# EAGLE board with_solar_universal (EAGLE 9.4.2)
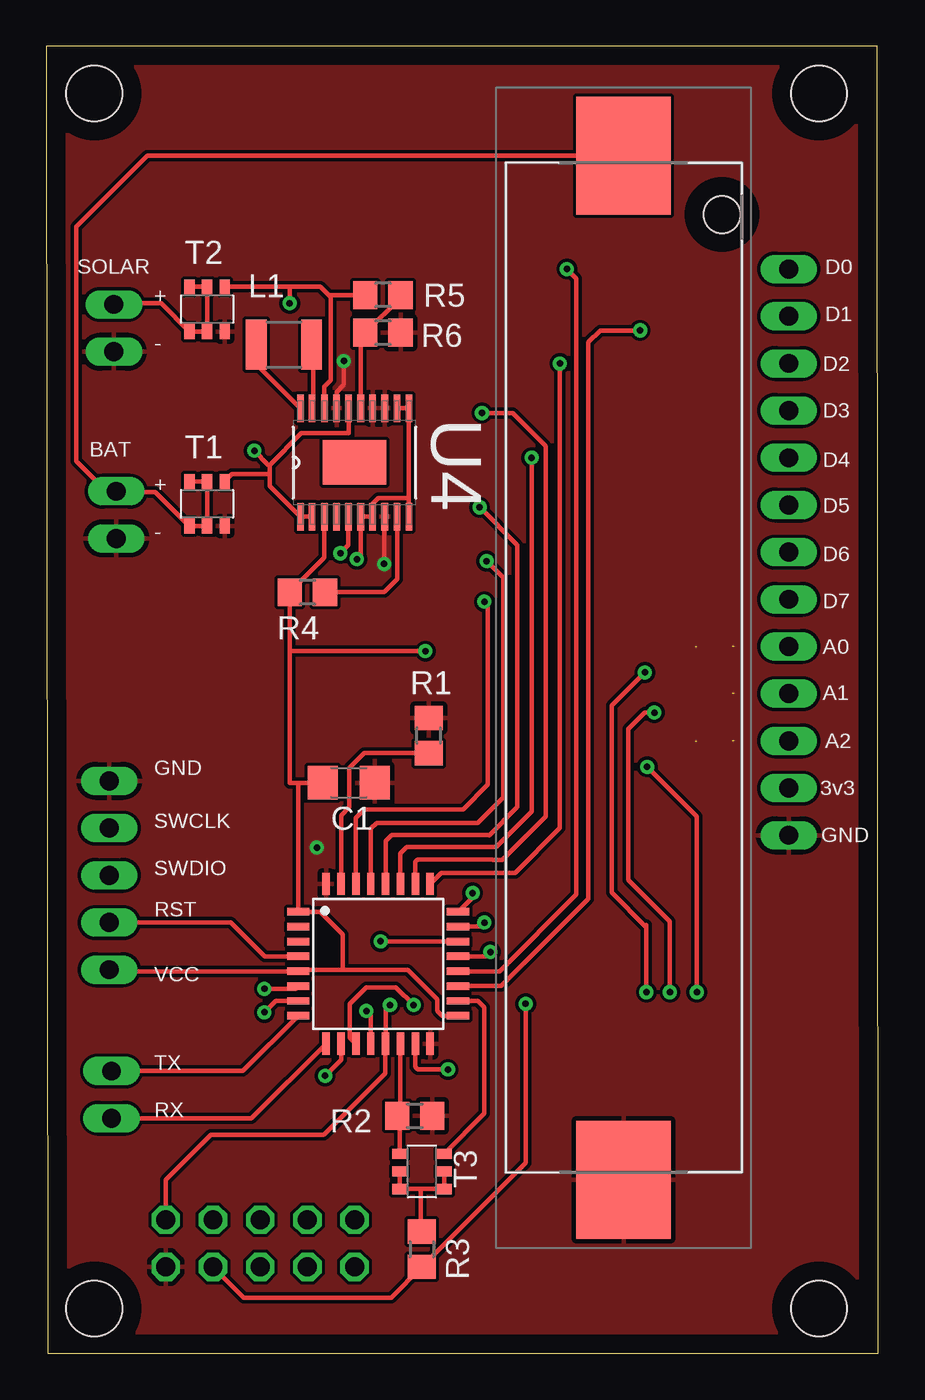
[diagram p0: board, top side]
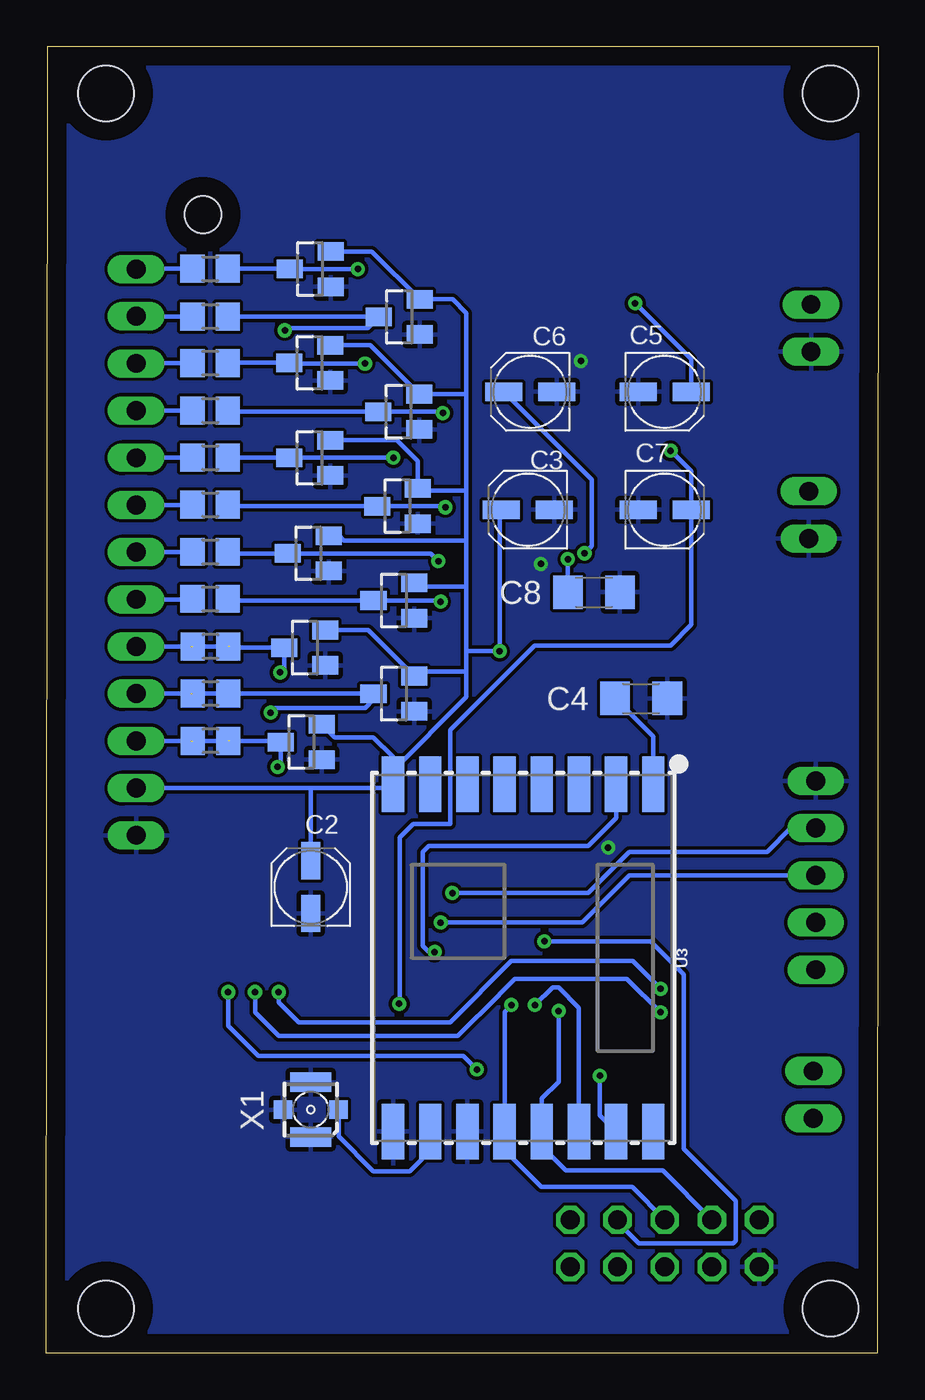
[diagram p1: board, bottom side, seen from below]

Size 44.78 x 70.35 mm. Coordinates in mm from the lower left corner, seen from the top.
Outline: 0.07,0 44.78,0 44.7,70.35 0,70.35 0.07,0
Copper layers (1*16): Top 0.035mm / dielectric 1.5mm / Bottom 0.035mm
Design rules "default *": minimum track width 6mil, minimum drill 0.35mm, track to track 7mil, track to pad 6mil, pad to pad 6mil, via to via 6mil, smd to smd 6mil, copper to edge 40mil, drill to drill 6mil, minimum pad ring 10mil, minimum via ring 8mil, stop-mask expansion 4mil, vias tented up to drill 0mil, thermal gap 10mil
Holes 3 mm at 2.57,2.41 41.57,2.41 41.57,67.81 2.57,67.81

## Footprints (pad centres in the part's own frame; a part is rotated, then mirrored left to right if it is on the bottom)
C1206 = smd 1.6 x 1.8: 1 -1.4,0; 2 1.4,0
UD-4X5,8_NICHICON = smd 2 x 1: + 1.425,0; - -1.425,0
SOT23 = smd 1 x 1.4: 1 -0.95,-1.1; 2 0.95,-1.1; 3 0,1.1
1076 = smd 6.35 x 5.08: 1 -27.57,0; 2 27.57,0 | hole 1.98: -24.395,5.3
R1210 = smd 1.12 x 2.7: 1 -1.49,0; 2 1.49,0
R0805 = smd 1.3 x 1.5: 1 -0.95,0; 2 0.95,0
LQFP32-7X7 = smd 1.2 x 0.4: 1 -4.3,2.8; 2 -4.3,2; 3 -4.3,1.2; 4 -4.3,0.4; 5 -4.3,-0.4; 6 -4.3,-1.2; 7 -4.3,-2; 8 -4.3,-2.8; 17 4.3,-2.8; 18 4.3,-2; 19 4.3,-1.2; 20 4.3,-0.4; 21 4.3,0.4; 22 4.3,1.2; 23 4.3,2; 24 4.3,2.8 | smd 0.4 x 1.2: 9 -2.8,-4.3; 10 -2,-4.3; 11 -1.2,-4.3; 12 -0.4,-4.3; 13 0.4,-4.3; 14 1.2,-4.3; 15 2,-4.3; 16 2.8,-4.3; 25 2.8,4.3; 26 2,4.3; 27 1.2,4.3; 28 0.4,4.3; 29 -0.4,4.3; 30 -1.2,4.3; 31 -2,4.3; 32 -2.8,4.3
SOT457R_PHILIPS = smd 0.55 x 0.8: 1 -0.95,-1.2; 2 0,-1.2; 3 0.95,-1.2; 4 0.95,1.2; 5 0,1.2; 6 -0.95,1.2
RFM69W-XXXS2 = smd 3 x 1.2: 1 -9.35,7; 2 -9.35,5; 3 -9.35,3; 4 -9.35,1; 5 -9.35,-1; 6 -9.35,-3; 7 -9.35,-5; 8 -9.35,-7; 9 9.35,-7; 10 9.35,-5; 11 9.35,-3; 12 9.35,-1; 13 9.35,1; 14 9.35,3; 15 9.35,5; 16 9.35,7
LTC3106 = smd 1.473 x 0.356: 1 -2.921,2.921; 2 -2.921,2.286; 3 -2.921,1.626; 4 -2.921,0.965; 5 -2.921,0.33; 6 -2.921,-0.33; 7 -2.921,-0.965; 8 -2.921,-1.626; 9 -2.921,-2.286; 10 -2.921,-2.921; 11 2.921,-2.921; 12 2.921,-2.286; 13 2.921,-1.626; 14 2.921,-0.965; 15 2.921,-0.33; 16 2.921,0.33; 17 2.921,0.965; 18 2.921,1.626; 19 2.921,2.286; 20 2.921,2.921 | smd 2.388 x 3.404: 21 0,0
MA02-1 = drill 1.016 long: 1 -2.54,0; 2 0,0
MA05-1 = drill 1.016 long: 1 -5.08,0; 2 -2.54,0; 3 0,0; 4 2.54,0; 5 5.08,0
MA05-2 = drill 1.016 octagon: 1 -5.08,-1.27; 2 -5.08,1.27; 3 -2.54,-1.27; 4 -2.54,1.27; 5 0,-1.27; 6 0,1.27; 7 2.54,-1.27; 8 2.54,1.27; 9 5.08,-1.27; 10 5.08,1.27
MA13-1 = drill 1.016 long: 1 -15.24,0; 2 -12.7,0; 3 -10.16,0; 4 -7.62,0; 5 -5.08,0; 6 -2.54,0; 7 0,0; 8 2.54,0; 9 5.08,0; 10 7.62,0; 11 10.16,0; 12 12.7,0; 13 15.24,0
734120110 = smd 1 x 1: 1 0,-1.5; S@1 0,1.5 | smd 1.05 x 2.2: S@2 -1.475,0; S@3 1.475,0

## Placement (x,y rotation side)
C1  100n  [C1206]  16.27,30.71 0 top
C2  10u  [UD-4X5,8_NICHICON]  30.55,25.09 90 bottom
C3  47u  [UD-4X5,8_NICHICON]  18.87,45.41 180 bottom
C4  100n  [C1206]  12.77,35.25 0 bottom
C5  47u  [UD-4X5,8_NICHICON]  11.5,51.76 0 bottom
C6  2,2u  [UD-4X5,8_NICHICON]  18.74,51.76 180 bottom
C7  47u  [UD-4X5,8_NICHICON]  11.5,45.41 0 bottom
C8  100n  [C1206]  15.31,40.96 0 bottom
D1  BAS70-04  [SOT23]  30.58,58.36 90 bottom
D2  BAS70-04  [SOT23]  25.79,55.79 90 bottom
D3  BAS70-04  [SOT23]  30.62,53.31 90 bottom
D4  BAS70-04  [SOT23]  25.82,50.68 90 bottom
D5  BAS70-04  [SOT23]  30.62,48.2 90 bottom
D6  BAS70-04  [SOT23]  25.89,45.6 90 bottom
D7  BAS70-04  [SOT23]  30.68,43.06 90 bottom
D8  BAS70-04  [SOT23]  26.08,40.52 90 bottom
D9  BAS70-04  [SOT23]  30.87,37.98 90 bottom
D10  BAS70-04  [SOT23]  26.08,35.5 90 bottom
D11  BAS70-04  [SOT23]  31.06,32.9 90 bottom
J1  1076  [1076]  31.06,36.9 270 top
L1  10u  [R1210]  12.77,54.3 0 top
R1  10k  [R0805]  20.57,33.25 90 top
R2  8k  [R0805]  19.82,12.77 180 top
R3  2k  [R0805]  20.2,5.59 270 top
R4  1M  [R0805]  14.04,40.96 180 top
R5  2M  [R0805]  18.11,56.96 180 top
R6  365k  [R0805]  18.11,54.93 180 top
R7  300R  [R0805]  35.96,58.37 0 bottom
R8  300R  [R0805]  35.96,55.81 0 bottom
R9  300R  [R0805]  35.96,53.31 0 bottom
R10  300R  [R0805]  35.96,50.74 0 bottom
R11  300R  [R0805]  35.96,48.21 0 bottom
R12  300R  [R0805]  35.96,45.67 0 bottom
R13  300R  [R0805]  35.96,43.14 0 bottom
R14  300R  [R0805]  35.96,40.61 0 bottom
STM32L031K6_1  STM32L031K6  [LQFP32-7X7]  17.85,20.96 0 top
T1  RTQ035P02HZG  [SOT457R_PHILIPS]  8.65,45.72 0 top
T2  RTQ035P02HZG  [SOT457R_PHILIPS]  8.65,56.2 0 top
T3  [SOT457R_PHILIPS]  20.2,9.78 90 top
U3  RFM69HW  [RFM69W-XXXS2]  19.12,21.28 270 bottom
U4  LTC3106  [LTC3106]  16.58,47.95 90 top
U$1  SJ-C  [R0805]  35.95,38.04 180 bottom
U$2  SJ-C  [R0805]  35.95,35.5 180 bottom
U$3  SJ-C  [R0805]  35.95,32.96 180 bottom
U$4  MA02-1  [MA02-1]  3.76,46.39 90 top
U$5  MA02-1  [MA02-1]  3.63,56.45 90 top
U$6  MA02-1  [MA02-1]  3.5,12.64 270 top
U$7  MA05-1  [MA05-1]  3.38,25.72 270 top
U$8  MA05-2  [MA05-2]  11.5,5.91 0 top
U$9  MA13-1  [MA13-1]  39.95,43.12 270 top
X1  734120110  [734120110]  30.55,13.11 90 bottom

## Library data of the parts
C1-C8 = rcl; SPICEPREFIX: C
D1-D11 = nxp_60
J1 = 1076; DESCRIPTION: Cylindrical Battery Contacts, Clips, Holders & Springs AAA holder w/ coil Spring SMT; HEIGHT: 11.18mm; MANUFACTURER_NAME: Keystone Electronics; MANUFACTURER_PART_NUMBER: 1076; MOUSER_PART_NUMBER: 534-1076; MOUSER_PRICE-STOCK: https://www.mouser.com/Search/Refine.aspx?Keyword=534-1076
L1 STM32L031K6_1 T1-T3 U$1-U$9 = dp
R1-R14 = rcl; SPICEPREFIX: R
U3 = SparkFun-RF
U4 = LTC3106
X1 = con-coax

## Nets
A0: D9.3 STM32L031K6_1.6 U$1.1
A1: D10.3 STM32L031K6_1.7 U$2.1
A2: D11.3 STM32L031K6_1.15 U$3.1
BAT_ADC: R2.2 STM32L031K6_1.14 T3.4
BAT_IN: C7.+ R3.2 T1.4 U4.1 U4.2 U4.16 U$8.3
BAT_SW: STM32L031K6_1.18 T3.3
D2: D3.3 R9.2 STM32L031K6_1.25
D3: D4.3 R10.2 STM32L031K6_1.26
D4: D5.3 R11.2 STM32L031K6_1.27
D5: D6.3 R12.2 STM32L031K6_1.28
D6: D7.3 R13.2 STM32L031K6_1.29
D7: D8.3 R14.2 STM32L031K6_1.30
GND: C1.2 C2.- C3.- C4.2 C5.- C6.- C7.- C8.2 D1.1 D2.1 D3.1 D4.1 D5.1 D6.1 D7.1 D8.1 D9.1 D10.1 D11.1 J1.2 R1.2 R2.1 R6.1 STM32L031K6_1.16 STM32L031K6_1.32 T1.3 T2.3 U3.9 U3.11 U4.8 U4.13 U4.14 U4.17 U$4.1 U$5.1 U$7.1 U$8.1 U$9.13 X1.S@1 X1.S@2 X1.S@3
I2C_SCL: D2.3 R8.2 STM32L031K6_1.19
I2C_SDA: D1.3 R7.2 STM32L031K6_1.20
N$1: R1.1 STM32L031K6_1.31
N$2: U3.10 X1.1
N$3: L1.1 U4.20
N$4: L1.2 U4.19
N$5: C6.+ U4.5
N$6: R4.1 U4.9
N$7: R5.1 R6.2 U4.15
N$8: R7.1 U$9.1
N$9: R8.1 U$9.2
N$10: C4.1 U3.1
N$11: R9.1 U$9.3
N$12: R10.1 U$9.4
N$13: R11.1 U$9.5
N$14: R12.1 U$9.6
N$15: R13.1 U$9.7
N$16: R14.1 U$9.8
N$17: U$1.2 U$9.9
N$18: U$2.2 U$9.10
N$19: R3.1 T3.1 T3.2 T3.5 T3.6
N$20: U$3.2 U$9.11
NRST: STM32L031K6_1.4 U$7.4
PWR_VCC: C8.1 U4.6 U4.7 U4.10 U4.11 U4.12
RFM_INT: STM32L031K6_1.21 U3.2
SOLAR_IN: C5.+ R5.2 T2.4 U4.18
SPI_MISO: STM32L031K6_1.12 U3.13 U$8.4
SPI_MOSI: STM32L031K6_1.13 U3.14 U$8.2
SPI_NSS: STM32L031K6_1.10 U3.15
SPI_NSS2: STM32L031K6_1.22 U$8.8
SPI_SCK: STM32L031K6_1.11 U3.12 U$8.6
SWCLK: STM32L031K6_1.24 U$7.2
SWDIO: STM32L031K6_1.23 U$7.3
T1: J1.1 T1.1 T1.2 T1.5 T1.6 U$4.2
T2: T2.1 T2.2 T2.5 T2.6 U$5.2
UART_RX: STM32L031K6_1.9 U$6.2
UART_TX: STM32L031K6_1.8 U$6.1
VCC: C1.1 C2.+ C3.+ D1.2 D2.2 D3.2 D4.2 D5.2 D6.2 D7.2 D8.2 D9.2 D10.2 D11.2 R4.2 STM32L031K6_1.1 STM32L031K6_1.5 STM32L031K6_1.17 U3.8 U4.3 U$7.5 U$9.12

## Tracks (layer width: path | path; a pad name or v marks a point on that pad's centre or on a via)
A0  (via drill 0.35)  (1 unrouted)
  Top 0.254: STM32L031K6_1.6 13.41,19.61 v11.73,19.61 | v32.29,19.43 32.29,22.93 | 32.29,22.93 32.29,23.05 | 32.29,22.93 30.43,24.79 30.43,34.86 v32.2,36.64
  Bottom 0.254: v11.73,19.61 13.22,21.11 19.75,21.11 23.06,17.8 31.2,17.8 32.29,18.89 v32.29,19.43 | 34.91,38.04 34.85,37.98 D9.3 31.97,36.88 v32.2,36.64
A1  (via drill 0.35)
  Top 0.254: STM32L031K6_1.7 12.34,18.96 v11.73,18.34 | v33.55,19.43 33.55,23.23 31.32,25.47 31.32,33.59 32.2,34.48 v32.71,34.48
  Bottom 0.254: v11.73,18.34 13.54,20.15 19.57,20.15 20.42,19.31 20.42,19.3 22.63,17.08 32.29,17.08 33.55,18.34 v33.55,19.43 | U$2.1 D10.3 27.18,35.19 27.63,34.74 32.46,34.74 v32.71,34.48
A2  (via drill 0.35)  (1 unrouted)
  Top 0.254: STM32L031K6_1.15 19.85,15.4 19.98,15.27 v21.61,15.27 | v32.33,31.56 35,28.89 v35,19.43
  Bottom 0.254: v21.61,15.27 22.33,15.99 33.37,15.99 35,17.62 v35,19.43 | 34.91,32.96 32.22,32.96 D11.3 32.16,31.73 v32.33,31.56
BAT_ADC
  Top 0.254: T3.4 19,12.64 | 19,12.64 R2.2 | STM32L031K6_1.14 19.05,12.69 19,12.64
BAT_IN  (via drill 0.35)
  Top 0.254: U4.16 16.27,50.85 16.27,49.53 13.73,49.53 12.01,47.82 | U4.2 U4.1 12.01,46.68 12.01,47.31 | 12.01,47.82 12.01,47.31 | T1.4 9.98,47.31 12.01,47.31 | 12.01,47.82 11.95,47.82 v11.19,48.58 | v25.79,18.8 25.79,10.23 R3.2 18.55,2.99 10.67,2.99 10.61,2.99 U$8.3
  Bottom 0.254: v11.19,48.58 10.08,47.47 C7.+ 10.08,39.21 11.19,38.1 18.49,38.1 23.06,33.53 23.06,28.48 25.05,28.48 25.77,27.76 25.77,18.82 v25.79,18.8
BAT_SW
  Top 0.254: STM32L031K6_1.18 23.22,18.96 23.57,18.61 23.57,12.9 T3.3
D2  (via drill 0.35)
  Top 0.254: STM32L031K6_1.25 21.24,25.85 25.22,25.85 27.63,28.26 v27.63,53.28
  Bottom 0.254: R9.2 D3.3 31.69,53.28 v27.63,53.28
D3  (via drill 0.35)
  Top 0.254: STM32L031K6_1.26 19.85,26.43 19.98,26.56 24,26.56 24.01,26.55 24.52,26.55 26.87,28.9 26.87,48.83 25.09,50.61 v23.44,50.61
  Bottom 0.254: R10.2 34.95,50.68 D4.3 23.5,50.68 v23.44,50.61
D4  (via drill 0.35)
  Top 0.254: STM32L031K6_1.27 19.05,26.9 19.4,27.24 24.2,27.24 26.11,29.15 v26.11,48.2
  Bottom 0.254: R11.2 D5.3 v26.11,48.2
D5  (via drill 0.35)
  Top 0.254: STM32L031K6_1.28 18.25,27.57 18.57,27.89 23.82,27.89 23.82,27.88 25.35,29.4 25.35,43.5 v23.31,45.53
  Bottom 0.254: R12.2 34.94,45.6 D6.3 23.38,45.6 v23.31,45.53
D6  (via drill 0.35)
  Top 0.254: STM32L031K6_1.29 17.45,28.24 17.76,28.55 23.22,28.55 24.58,29.9 24.58,41.75 v23.68,42.64
  Bottom 0.254: R13.2 34.93,43.06 D7.3 24.1,43.06 v23.68,42.64
D7  (via drill 0.35)
  Top 0.254: STM32L031K6_1.30 16.65,28.81 17.12,29.28 22.43,29.28 23.76,30.61 23.76,40.26 v23.57,40.45
  Bottom 0.254: R14.2 34.92,40.52 D8.3 23.63,40.52 v23.57,40.45
GND  (via drill 0.35)
  Top 0.254: v18.17,42.48 18.17,44.99 U4.8 | U4.17 15.62,51.74 16.01,52.14 v16.01,53.41
  other vias: 14.55,27.21
  pour Top: 0.39,70.52 0.39,-0.49 44.71,-0.49 44.71,70.52
  pour Bottom: 0.39,70.53 0.39,-0.62 44.84,-0.62 44.84,70.53
I2C_SCL  (via drill 0.35)
  Top 0.254: STM32L031K6_1.19 24.47,19.76 29.16,24.44 29.16,54.42 29.79,55.06 v31.95,55.06
  Bottom 0.254: R8.2 26.91,55.81 D2.3 27.49,55.18 31.82,55.18 v31.95,55.06
I2C_SDA  (via drill 0.35)
  Top 0.254: STM32L031K6_1.20 24.39,20.56 28.52,24.69 28.52,57.85 v28.01,58.36
  Bottom 0.254: R7.2 31.7,58.37 D1.3 v28.01,58.36
N$1
  Top 0.254: R1.1 17.1,32.3 16.31,31.5 16.31,29.41 15.85,28.96 STM32L031K6_1.31
N$2
  Bottom 0.254: X1.1 29.05,11.66 27.18,9.78 25.22,9.78 24.12,10.88 U3.10
N$3
  Top 0.254: U4.20 11.28,53.25 L1.1
N$4
  Top 0.254: U4.19 14.36,50.93 14.36,54.2 L1.2
N$5  (via drill 0.35)
  Top 0.254: U4.5 16.25,43.49 v15.82,43.06
  Bottom 0.254: v15.82,43.06 15.44,43.44 15.44,47.03 C6.+
N$6
  Top 0.254: U4.9 18.87,41.66 18.17,40.96 R4.1
N$7
  Top 0.254: R5.1 19.06,56.83 R6.2 16.91,54.69 U4.15
N$8
  Bottom 0.254: R7.1 39.94,58.37 U$9.1
N$9
  Bottom 0.254: U$9.2 39.94,55.81 R8.1
N$10
  Bottom 0.254: C4.1 12.12,33.2 U3.1
N$11
  Bottom 0.254: R9.1 39.93,53.3 U$9.3
N$12
  Bottom 0.254: U$9.4 R10.1
N$13
  Bottom 0.254: R11.1 U$9.5
N$14
  Bottom 0.254: U$9.6 36.93,45.66 R12.1
N$15
  Bottom 0.254: U$9.7 36.93,43.12 R13.1
N$16
  Bottom 0.254: U$9.8 36.94,40.58 R14.1
N$17  (1 unrouted)
  Bottom 0.254: U$9.9 37.02,38.04
N$18  (1 unrouted)
  Bottom 0.254: U$2.2 36.92,35.52 | U$9.10 37.04,35.5 37.02,35.52
N$19
  Top 0.254: T3.5 T3.6 20.14,8.83 | 20.14,8.83 T3.1 T3.2 | R3.1 20.14,6.6 20.14,8.83
N$20  (1 unrouted)
  Bottom 0.254: U$9.11 37.02,32.96
NRST
  Top 0.254: STM32L031K6_1.4 11.74,21.36 10.08,23.01 9.92,23.18 U$7.4
PWR_VCC  (via drill 0.35)
  Top 0.254: U4.12 U4.11 U4.10 19.5,45.98 19.44,46.04 17.85,46.04 17.55,45.74 U4.7 U4.6 16.91,42.94 v16.71,42.74
  Bottom 0.254: C8.1 v16.71,42.74
RFM_INT  (via drill 0.35)
  Top 0.254: v23.89,21.59 23.65,21.36 STM32L031K6_1.21
  Bottom 0.254: U3.2 14.12,28.82 15.63,27.31 24.2,27.31 24.52,26.99 24.52,21.91 24.2,21.59 v23.89,21.59
SOLAR_IN  (via drill 0.35)
  Top 0.254: U4.18 14.96,52.03 15.31,52.39 15.31,56.84 15.19,56.96 | T2.4 13.09,57.4 | 13.09,57.4 14.75,57.4 15.19,56.96 | v13.09,56.52 13.09,57.4 | 15.19,56.96 R5.2
  Bottom 0.254: v13.09,56.52 10.08,53.51 C5.+
SPI_MISO  (via drill 0.35)
  Top 0.254: STM32L031K6_1.12 17.45,18.18 v17.22,18.42
  Bottom 0.254: v17.22,18.42 17.22,14.61 18.12,13.7 U3.13 18.12,11.13 16.84,9.85 11.61,9.85 11.61,9.83 U$8.4
SPI_MOSI  (via drill 0.35)
  Top 0.254: v18.49,18.74 18.25,18.5 STM32L031K6_1.13 18.23,16.64 18.23,15.05 14.93,11.75 8.84,11.75 6.41,9.32 6.42,9.31 U$8.2
  Bottom 0.254: U3.14 16.12,18.59 17.22,19.69 17.54,19.69 v18.49,18.74
SPI_NSS  (via drill 0.35)
  Top 0.254: STM32L031K6_1.10 15.85,15.78 v15,14.93
  Bottom 0.254: v15,14.93 15,12.8 U3.15
SPI_NSS2  (via drill 0.35)
  Top 0.254: STM32L031K6_1.22 v17.99,22.16 v17.98,22.16
  Bottom 0.254: v17.98,22.16 12.27,22.16 10.49,20.39 10.49,10.99 7.69,8.19 7.69,6.04 7.82,5.91 12.9,5.91 14.04,7.05 U$8.8
SPI_SCK  (via drill 0.35)
  Top 0.254: v19.76,18.74 18.81,19.69 17.22,19.69 16.34,18.81 16.34,16.98 STM32L031K6_1.11
  Bottom 0.254: v19.76,18.74 20.12,18.37 U3.12 20.12,10.92 18.16,8.96 13.26,8.96 13.26,8.94 U$8.6
SWCLK  (via drill 0.35)
  Top 0.254: v22.93,24.77 22.93,24.54 STM32L031K6_1.24
  Bottom 0.254: v22.93,24.77 15.63,24.77 13.41,26.99 5.99,26.99 4.72,28.26 U$7.2
SWDIO  (via drill 0.35)
  Top 0.254: v23.57,23.18 23.35,22.96 STM32L031K6_1.23
  Bottom 0.254: v23.57,23.18 15.95,23.18 13.55,25.58 13.41,25.72 U$7.3
T1
  Top 0.254: T1.6 T1.5 T1.2 T1.1 5.86,46.36 3.79,46.36 U$4.2 3.21,46.39 1.6,48.01 1.6,60.65 5.42,64.47 J1.1
T2
  Top 0.254: T2.6 T2.5 T2.2 T2.1 6.18,56.52 3.69,56.52 U$5.2
UART_RX
  Top 0.254: U$6.2 11.03,12.64 STM32L031K6_1.9
UART_TX
  Top 0.254: U$6.1 10.58,15.18 STM32L031K6_1.8
VCC  (via drill 0.35)
  Top 0.254: 15.95,20.64 13.64,20.64 STM32L031K6_1.5 3.46,20.56 U$7.5 | 15.95,20.64 19.44,20.64 21.03,19.05 21.03,18.42 21.29,18.16 STM32L031K6_1.17 | 15.95,20.64 15.95,22.55 14.74,23.76 STM32L031K6_1.1 13.55,30.71 | U4.3 14.96,42.82 R4.2 13.09,37.79 | C1.1 13.55,30.71 | 13.09,37.79 13.09,30.71 13.55,30.71 | v20.39,37.79 13.09,37.79
  Bottom 0.254: C3.+ 20.39,45.41 v20.39,37.79 22.17,37.79 | D1.2 27.26,59.31 D2.2 22.91,56.74 22.17,56 22.17,51.63 | D3.2 27.36,54.26 D4.2 22.17,51.63 | D5.2 25.92,49.15 24.79,48.02 D6.2 24.79,46.42 22.17,46.42 | D9.2 27.45,38.93 D10.2 24.72,36.7 22.17,36.7 | 22.17,36.7 22.17,37.79 | 22.17,37.79 22.17,41.28 | 22.17,41.28 22.17,43.75 | 22.17,43.75 22.17,46.42 | 22.17,46.42 22.17,51.63 | D8.2 24.98,41.28 22.17,41.28 | D11.2 29.27,33.15 27.19,33.15 26.12,32.09 U3.8 | 22.17,36.7 22.17,35.31 26.12,31.36 U3.8 | D7.2 29.03,44.01 28.78,43.75 22.17,43.75 | U$9.12 34.46,30.42 34.46,30.43 30.57,30.43 | 30.57,30.43 26.32,30.43 U3.8 | C2.+ 30.55,30.41 30.57,30.43

## Text on the board
tNames: SOLAR | D0 | + | D1 | - | D2 | D3 | BAT | D4 | + | D5 | - | D6 | D7 | A0 | A1 | A2 | GND | 3v3 | SWCLK | GND | SWDIO | RST | VCC | TX | RX